# Altium PCB main_board.PcbDoc (part 3 of 3)
Units mil, origin at the board's own origin, x right, y up, seen from the top; angles counter-clockwise.
Board outline 11417.32 x 7421.26 mil, 2 copper layers (Top Layer, Bottom Layer); 177 components, 88 nets, 592 pads, 139 vias.
Unrouted connection lines stored in the file: 154.
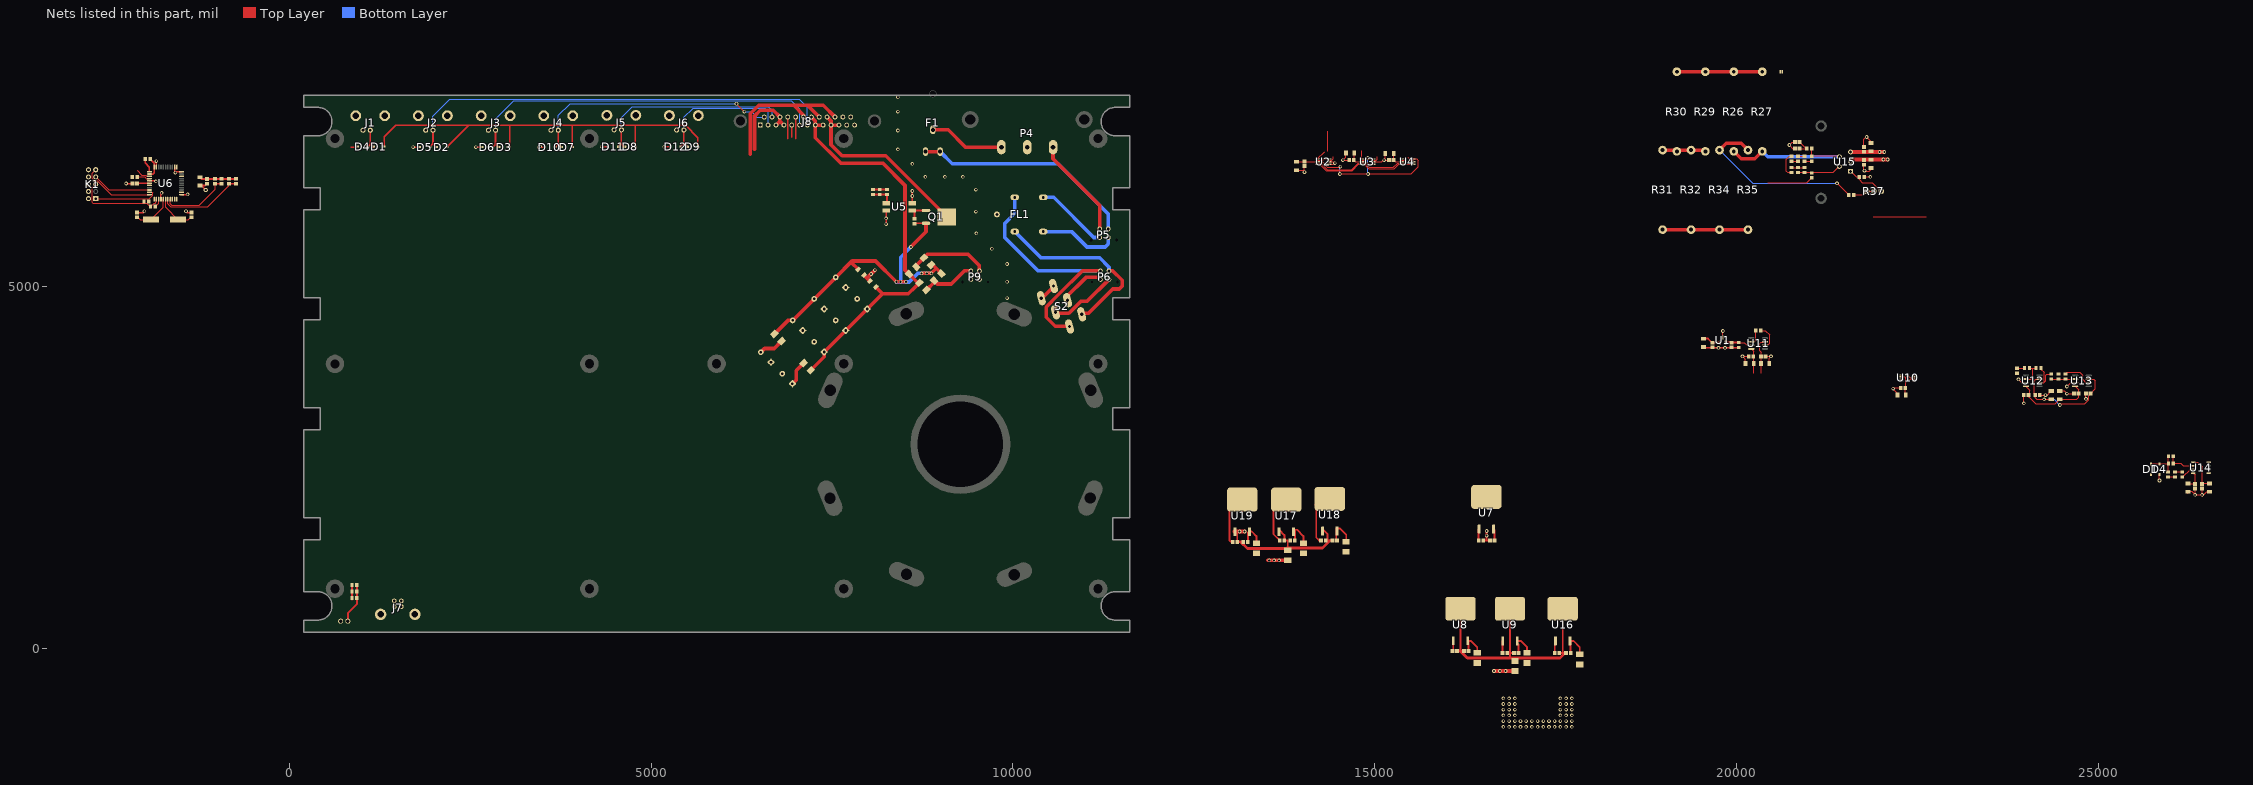
[diagram p2: the nets of this part, all layers, seen from the top]

## Part data (continued)
VR1 VR2: library part Varistor_MOV, "Varistor", Case=1206, Manufacturer=EPCOS, Manufacturer Part Number=B72520T0250K062, Max. operating voltage="25V AC", Power=8mW, Supplier Part Number 1=B72520T250K62, Varistor max current 8/20µs=200A, Category="SMD Varistors", ComponentLink1Description=http://static.tme.eu/products_pics/c/0/9/c09a96f753270fa18ba9e61c943ff8c8/58311.jpg, ComponentLink1URL=http://static.tme.eu/products_pics/c/0/9/c09a96f753270fa18ba9e61c943ff8c8/58311.jpg, Energy 2 ms=1J, MinAmount=5, Mounting=SMD, Multiples=1, Price Type=NET, Pricing 1="5=0.194, 50=0.158, 100=0.128, 500=0.119, 2000=0.114 (EUR)", Stock 1=1646, SuppliedAmount=0, Supplier 1=TME, Unit=pcs, Varistor type=metal-oxide, Weight=0.058
X1: library part CRYSTAL-GENERIC, "quartz crystal", Capacitance=20pF, Case=HC49SM, Frequency=16MHz, Manufacturer=YIC, Power=1mW, Resonator tolerance=±30ppm, Supplier Part Number 1=16.00M-SMDHC49S, Category="SMD Quartz Crystals", ComponentLink1Description=http://static.tme.eu/products_pics/0/4/3/0433aed25ec1f9097194a826a55aa53d/56913.jpg, ComponentLink1URL=http://static.tme.eu/products_pics/0/4/3/0433aed25ec1f9097194a826a55aa53d/56913.jpg, MinAmount=2, Mounting=SMD, Multiples=1, Price Type=NET, Pricing 1="2=0.3697, 10=0.2143, 100=0.1318, 1000=0.1033, 4000=0.0995 (EUR)", Resonator type=quartz, Stock 1=11958, SuppliedAmount=0, Supplier 1=TME, Time stability=±5ppm/year, Unit=pcs, Weight=1.11

## Free pads (board coordinates)
  round 255.91 hole 125.98: 2(631.89,826.77) 2(631.89,3935) 2(631.89,7047.24) 2(4147.64,826.77) 2(4147.64,3937.01) 2(4147.64,7047.24) 2(5905.51,3937.01) 2(7663.39,826.77) 2(7663.39,3937.01) 2(7663.39,7047.24) 2(11179.13,826.77) 2(11179.13,3937.01) 2(11179.13,7047.24)
  round 60 hole 30: 3(-1154.71,6337.85)

## Via types
v1: diameter 50, hole 28, Top Layer to Bottom Layer, 139 vias

## Nets (pads, with @x,y where several pads share a name; then routed paths per layer and width w, separated by ;. In a path a pad name is that pad's centre, name@x,y a point inside that pad or via, vN(x,y) a via of type N, cw(c..) or ccw(c..) an arc to the next point about the centre after c; other vN are vias at no path point)
2.5V: R17.1 R40.2 R41.2 U2.5 U2.7 U3.5 U3.7 U4.5 U4.7 U11.6 U14.6 | length 2978.6
  Top Layer w10: U2.7@14209.29,6749.68 14279.68,6749.68 ; U2.5@14370.71,6769.37 14299.37,6769.37 14279.68,6749.68 ; v1(14520,6560) v1(14910,6560) 15505,6560 15605,6660 15605,6745 15580.63,6769.37 U4.5@15530.71,6769.37 ; v1@14525,6655 14345,6655 14279.68,6720.32 14279.68,6749.68 ; U3.7@14819.29,6749.68 14854.68,6749.68 14874.37,6769.37 U3.5@14980.71,6769.37 ; R17.1@20334.61,4394.02 20398.58,4394.02 20457.64,4334.96 20457.64,4216.85 20432.64,4191.85 U11.6@20394.65,4191.85 ; R40.2@26038.39,2657.48 R41.2@26038.39,2559.06 26141.73,2559.06 26174.61,2526.18 U14.6@26312.2,2526.18
  Bottom Layer w10: v1(14520,6560) 14520,6655 v1(14525,6660) ; v1@14905,6565 v1(14905,6780)
5V: C1.1 C2.1 C4.1 C5.1 C6.1 C7.1 C8.1 C9.1 C10.1 C11.1 C22.1 C29.1 C30.1 D1.K D2.K D3.K D7.K D8.K D9.K J8.17 K1.2 R7.2 R8.2 R9.2 R10.2 R11.2 R14.2 U1.1 U2.8 U3.1 U3.8 U4.8 U6.2 U6.14 U6.24 U6.34 U6.44 U7.3 U10.1 U10.2 U10.3 U10.6 U10.7 | length 9035.2
  Top Layer w8: R14.2@-1850.26,6107.85 -1804.2,6153.91 U6.14@-1804.2,6210.41
  Top Layer w10: C5.1@13930,6730 U2.8@14189.29,6730 ; C7.1@14717.09,6850 14717.09,6744.41 14731.5,6730 U3.8@14819.29,6730 14880,6730 14919.37,6690.63 U3.1@14980.71,6690.63 ; C9.1@15262.09,6845 15262.09,6749.41 15281.5,6730 U4.8@15369.29,6730 ; U7.3@16644.21,1652.22 U7.3@16657.48,1638.96 ; U10.3@22283.46,3740.16 U10.2@22283.46,3759.84 ; U10.1@22283.46,3779.53 U10.2@22283.46,3759.84 ; C29.1@22334.65,3509.84 C30.1@22334.65,3602.36 22342.52,3610.24 22342.52,3681.1 ; U10.6@22454.46,3700.79 U10.7@22454.46,3720.47 22381.89,3720.47 22342.52,3681.1 ; U10.2@22283.46,3759.84 22322.83,3759.84 22342.52,3740.16 22342.52,3681.1
  Top Layer w20: U6.2@-1932.15,6558.83 -1885.69,6558.83 -1867.19,6577.34 U6.44@-1867.19,6655.29 -1867.19,6710.38 -1920.26,6763.45 R11.2@-1920.26,6767.85 ; D1.K@1311.1,6938.82 1311.1,7071.1 1470,7230 2478.74,7230 ; D2.K@2179.76,6931.02 2478.74,7230 ; D3.K@3045.9,6931.02 3045.9,7230 ; D7.K@3912.05,6931.02 3912.05,7227.95 3910,7230 ; D8.K@4784.09,6936.93 4784.09,7224.09 4790,7230 ; D9.K@5647.48,6934.17 5647.48,7062.52 5480,7230 4790,7230 ; C29.1@22334.65,3509.84 C29.1@22340.55,3503.94 ; 2478.74,7230 3045.9,7230 ; 3045.9,7230 3910,7230 ; 3910,7230 4790,7230
  Top Layer w25: C10.1@-1234.71,6514.94 -1209.12,6489.35 C11.1@-1134.71,6489.35 R10.2@-734.71,6489.35 ; 6889.67,7050.33 J8.17@6889.67,7346.54 ; C22.1@16657.48,1496.06 U7.3@16657.48,1638.96 ; C1.1@19531.93,4284.88 19606.34,4284.88 19661.93,4229.29 19761.46,4229.29
12V: C33.1 C34.1 C35.1 C36.1 C37.1 C38.1 C39.1 C40.1 C41.1 D20.K D21.K D22.K J8.18 U11.7 U12.7 U13.7 U14.8 U15.5 | length 3156
  Top Layer w10: 20339.53,3803.46 C38.1@20339.53,3941.26 C39.1@20339.53,4039.68 20339.53,4098.74 20319.84,4118.43 20319.84,4216.85 20339.53,4236.54 20389.33,4236.54 U11.7@20394.65,4241.85 ; U12.7@24188.98,3725.79 24139.17,3725.79 24114.17,3700.79 24114.17,3519.69 C34.1@24129.92,3503.94 24129.92,3468.5 24151.57,3446.85 C33.1@24350.39,3446.85 ; v1@24468.5,3385.83 24814.69,3385.83 24867.3,3438.43 24867.3,3497.22 C35.1@24893.7,3523.62 24960.63,3590.55 24960.63,3700.79 24936.42,3725 U13.7@24869.49,3725 ; C40.1@26240.16,2281.5 C41.1@26332.68,2281.5 ; U14.8@26312.2,2426.18 26338.58,2399.8 C41.1@26338.58,2275.59 ; C41.1@26332.68,2261.81 C41.1@26338.58,2255.91
  Top Layer w25: 6998.37,7051.63 J8.18@6998.37,7346.54
  Top Layer w50: U15.5@21577.25,6863.94 v1(21980,6863.94) v1(22043.94,6863.94)
  Bottom Layer w10: v1(24251.97,3444.88) 24389.76,3444.88 v1(24468.5,3366.14)
-12V: C42.2 C43.2 C44.2 C45.2 C46.2 C47.2 C48.2 C49.2 C50.2 D25.A D26.A D27.A J8.5 U11.4 U12.4 U13.4 U14.5 U15.3 | length 2675.4
  Top Layer w10: U11.4@20205.67,4141.85 20241.1,4106.42 20241.1,3943.23 C47.2@20239.13,3941.26 20239.13,3805.43 ; U12.4@24000,3625.79 24055.12,3570.67 24055.12,3464.57 ; C43.2@24035.43,3503.94 24035.43,3484.25 24055.12,3464.57 ; U13.4@24680.51,3625 24728.35,3577.17 C44.2@24728.35,3523.62 24728.35,3472.44 24702.76,3446.85 C42.2@24468.5,3446.85 24407.48,3385.83 24133.86,3385.83 24055.12,3464.57 ; U14.5@26312.2,2576.18 26375.39,2576.18 26437.01,2514.57 26437.01,2283.46 26440.94,2287.4 C49.2@26529.53,2287.4 ; C49.2@26529.53,2267.72 C49.2@26535.43,2261.81
  Top Layer w25: 6944.02,7065.98 J8.5@6944.02,7234.72
  Top Layer w50: U15.3@21577.25,6730.08 21607.17,6760 v1(22030,6760) v1(22090,6760)
-VUN: C24.2 C25.2 C26.2 D17.A D18.A D19.K Q1.S R5.1 VR2.2 | length 4520.7
  Top Layer w25: R5.1@8639.88,5870.55 8647.16,5877.83 Q1.S@8799.88,5877.83
  Top Layer w50: D19.K@6704.85,4348.8 6891.68,4535.63 C26.2@6956.43,4535.63 C25.2@7253.42,4832.61 C24.2@7550.4,5129.6 7777.79,5356.98 8103.02,5356.98 v1(8390,5070) v1(8450,5070) v1(8520,5070) ; 7777.79,5326.47 VR2.2@7862.48,5241.79 ; v1(8590,5550) 8799.88,5759.88 Q1.S@8799.88,5877.83 ; v1(8740,5187.19) v1(8810,5187.19) v1(8873.17,5187.19) 8940.74,5254.76 ; D17.A@8894.39,5307.4 8894.39,5301.11 8940.74,5254.76 ; D18.A@9011.45,5184.05 8940.74,5254.76
  Bottom Layer w50: v1@8390,5066.98 8450,5066.98 8569.12,5066.98 8689.33,5187.19 v1(8740,5187.19) v1(8810,5187.19) v1(8873.17,5187.19) ; v1(8450,5070) 8450,5410 v1(8590,5550)
AUX1: J8.12 | length 61.6
  Top Layer w10: 15369.29,6749.68 15409.68,6749.68 15424.68,6764.68
AUX2: J8.24
CONN1_PRES: U6.21
CONN2_PRES: U6.20
CSADC: U6.22
D_N: R6.1 U6.3 | length 201.5
  Top Layer w15: -2100.26,6607.85 -2035.26,6542.85 -1985.75,6542.85 -1970.24,6527.34 U6.3@-1932.15,6527.34
D_P: R12.1 U6.4 | length 177.2
  Top Layer w15: R12.1@-2100.26,6517.85 -1996.11,6517.85 -1974.1,6495.84 U6.4@-1932.15,6495.84
Gauss: D2.A D5.K J2.1 J8.7 U4.4 | length 6439.8
  Top Layer w10: 14355,6875 14355,7149.27 ; 15455.19,6789.81 15495.32,6749.68 U4.4@15530.71,6749.68
  Top Layer w25: D5.K@1943.54,6931.02 1943.54,6937.32 1985.67,6979.45 ; J2.1@1985.67,7164.09 1985.67,6979.45 ; D2.A@2034.09,6931.02 1985.67,6979.45
  Bottom Layer w10: J2.1@1985.67,7164.09 1985.67,7355.67 2220,7590 7050,7590 7161.42,7478.58 J8.7@7161.42,7234.72
GND: C1.2 C2.2 C3.2 C4.2 C5.2 C6.2 C7.2 C8.2 C9.2 C10.2 C11.2 C12.1 C13.2 C14.2 C15.2 C16.2 C17.2 C18.2 C21.2 C22.2 C24.1 C25.1 C26.1 C27.1 C29.2 C30.2 C31.2 C32.2 C33.2 C34.2 C35.2 C36.2 C37.2 C38.2 C39.2 C40.2 C41.2 C42.1 C43.1 C44.1 C45.1 C46.1 C47.1 C48.1 C49.1 C50.1 D4.A D5.A D6.A D10.A D11.A D12.A D13.2 D23.K D24.A FL1.3 J1.1@20634,7970 J1.2@1019.53,7164.09 J1.A J1.B J2.2 J2.A J2.B J3.2 J3.A J3.B J4.2 J4.A J4.B J5.2 J5.A J5.B J6.2 J6.A J6.B J7.4 J8.1 J8.13 J8.25 K1.4 K1.6 K1.8 K1.10 P4.2 P9.3 P9.4 pad.3 R1.2 R42.2 U1.3 U2.1 U2.3 U3.3 U4.3 U5.2 U5.4 U6.5 U6.15 U6.23 U6.33 U6.35 U6.43 U7.2 U10.8 U12.3 U13.3 VR1.2 VR2.1 | length 7332
  Top Layer w10: C5.2@13920,6612.91 14002.91,6612.91 v1(14030,6585.83) C4.2@14030,6668.5 ; U2.1@14370.71,6690.63 14430.63,6690.63 v1(14450,6710) 14430,6730 U2.3@14370.71,6730 ; C7.2@14602.91,6850 14602.91,6792.91 v1(14560,6750) C6.2@14648.5,6750 ; U3.3@14980.71,6730 15100,6730 v1@15120,6750 ; C9.2@15147.91,6845 15147.91,6777.91 v1@15120,6750 ; C8.2@15198.5,6750 v1(15130,6750) v1@15120,6750 ; v1(19811.42,4388.9) 19812.19,4388.13 U1.3@19812.19,4300.38 ; C47.1@20124.96,3941.26 20124.96,3998.35 v1(20083.62,4039.68) C48.1@20170.24,4039.68 ; C39.2@20402.52,4039.68 v1(20477.32,4039.68) 20453.7,4016.06 C38.2@20453.7,3941.26 ; C32.2@20808.5,6910 20780,6910 v1(20730,6960) 20770,7000 C31.2@20808.5,7000 ; C46.1@21757.56,6686.77 v1@21757.56,6617.56 ; C37.2@21757.56,6934.8 21757.56,7037.56 21790,7070 v1(21800,7070) 21855.98,7014.02 C36.2@21855.98,6991.89 ; R42.2@21764.45,6520 v1(21850,6520) ; v1(21770,6605.12) v1@21757.56,6617.56 ; C45.1@21867.48,6630 21837.48,6600 21757.56,6600 v1@21757.56,6617.56 ; C29.2@22226.38,3503.94 22226.38,3521.65 22165.35,3582.68 v1(22165.35,3592.52) 22165.35,3602.36 C30.2@22271.65,3602.36 ; v1(22362.2,3779.53) 22401.57,3740.16 U10.8@22454.46,3740.16 ; v1(23897.64,3720.47) 23942.32,3675.79 U12.3@24000,3675.79 ; v1(23972.44,3389.76) C43.1@23972.44,3503.94 ; C34.2@24192.91,3503.94 v1(24271.65,3503.94) 24293.31,3503.94 C33.2@24350.39,3561.02 ; C42.1@24468.5,3561.02 24529.53,3561.02 v1(24566.93,3523.62) C44.1@24665.35,3523.62 ; v1(24566.93,3622.05) 24619.88,3675 U13.3@24680.51,3675 ; v1(24830.71,3452.76) C35.2@24830.71,3523.62 ; v1(25846.46,2322.83) D4.A@25846.46,2407.48 ; C40.2@26240.16,2147.64 C40.2@26246.06,2153.54 ; C40.2@26246.06,2173.23 26291.34,2173.23 v1(26338.58,2125.98) ; C41.2@26338.58,2212.6 v1(26338.58,2125.98) ; v1@26437.01,2106.3 v1@26442.91,2112.2 ; C50.1@26437.01,2212.6 v1(26437.01,2125.98) v1(26338.58,2125.98) ; v1@26442.91,2131.89 26462.6,2131.89 26498.03,2167.32 C49.1@26535.43,2167.32
  Top Layer w20: v1(-2254.71,6427.85) C12.1@-2174.71,6427.85 ; C13.2@-2101.52,6026.08 -2020.02,6026.08 v1(-2001.52,6044.58) ; U6.5@-1932.15,6464.35 -1851.2,6464.35 v1(-1844.71,6457.85) ; U6.43@-1835.69,6655.29 v1(-1835.69,6736.86) ; U6.15@-1772.7,6210.41 -1772.7,6289.86 v1(-1764.71,6297.85) ; U6.35@-1583.72,6655.29 -1583.72,6586.86 v1(-1574.71,6577.85) -1562.23,6590.33 U6.33@-1487.27,6590.33 ; U6.23@-1487.27,6275.37 v1@-1407.19,6275.37 ; v1(-1426.52,6044.58) -1408.01,6026.08 C14.2@-1351.52,6026.08 ; 847.09,6931.02 D4.A@931.73,6931.02 ; v1(1713.23,6931.02) D5.A@1797.87,6931.02 ; v1(2579.37,6931.02) D6.A@2664.02,6931.02 ; v1(3445.51,6931.02) D10.A@3530.16,6931.02 ; v1(4317.56,6936.93) D11.A@4402.21,6936.93 ; v1(5180.94,6934.17) D12.A@5265.59,6934.17 ; v1@8249.76,5854.88 v1(8249.76,5945.12) U5.2@8249.76,6055 ; U5.4@8610,6155 v1(8610,6255) v1@8610,6325
  Top Layer w25: C10.2@-1234.71,6400.76 C10.2@-1217.62,6400.76 ; pad.3@-1154.71,6337.85 C10.2@-1217.62,6400.76 ; C11.2@-1134.71,6426.35 -1160.3,6400.76 C10.2@-1217.62,6400.76 ; C21.2@16500,1496.06 16547.24,1496.06 ; v1(16547.24,1625.98) v1(16547.24,1561.02) 16547.24,1496.06 ; C22.2@16594.49,1496.06 16547.24,1496.06 ; C1.2@19541.93,4157.8 v1(19751.93,4157.8) v1(19841.93,4157.8) R1.2@20024.57,4157.8
  Top Layer w50: VR2.1@7943.21,5161.06 7984.16,5120.1 ; VR1.2@8025.11,5079.15 7984.16,5120.1 ; v1(8093.76,5229.71) v1(8040.73,5176.67) 7984.16,5120.1 ; v1@13523.62,1220.47 v1(13543.31,1220.47) 13543.78,1220 v1(13610,1220) 13680.63,1220 v1(13681.1,1220.47) D24.A@13799.21,1220.47 ; v1@16650,-309.76 v1(16730,-309.76) D23.K@16940,-309.76
  other v1: 16779.57,-1080.39 16858.31,-1080.39 16937.05,-1080.39 17015.79,-1080.39 17094.53,-1080.39 17173.27,-1080.39 17252.01,-1080.39 17330.75,-1080.39 17409.49,-1080.39 17488.23,-1080.39 17566.97,-1080.39 17645.71,-1080.39 17724.45,-1080.39 16779.57,-1001.65 16858.31,-1001.65 16937.05,-1001.65 17015.79,-1001.65 17094.53,-1001.65 17173.27,-1001.65 17252.01,-1001.65 17330.75,-1001.65 17409.49,-1001.65 17488.23,-1001.65 17566.97,-1001.65 17645.71,-1001.65 17724.45,-1001.65 16779.57,-922.91 16858.31,-922.91 16937.05,-922.91 17566.97,-922.91 17645.71,-922.91 17724.45,-922.91 16779.57,-844.17 16858.31,-844.17 16937.05,-844.17 17566.97,-844.17 17645.71,-844.17 17724.45,-844.17 16779.57,-765.43 16858.31,-765.43 16937.05,-765.43 17566.97,-765.43 17645.71,-765.43 17724.45,-765.43 16779.57,-686.69 16858.31,-686.69 16937.05,-686.69 17566.97,-686.69 17645.71,-686.69 17724.45,-686.69 16650,-310 16810,-310 9921.26,4842.52 9921.26,5070 9921.26,5314.96 9710,5526.22 9496.22,5740 8249.88,5865 9488.19,6040 -1404.71,6277.85 8609.88,6325 9488.19,6341.81 8790,6520 9060,6520 9310,6520 8610,6700 8410,6900 3467.09,6941.02 8410,7160 8410,7420 8410,7620
Heater_N: J8.10 J8.11 J8.22 Q1.D | length 2538.9
  Top Layer w50: J8.22@7433.17,7346.54 7487.52,7292.18 J8.10@7487.52,7234.72 ; J8.11@7596.22,7234.72 J8.10@7487.52,7234.72 ; Q1.D@9086.3,5978.7 Q1.D@9086.3,5966.42 8242.72,6810 7640,6810 7487.52,6962.48 J8.10@7487.52,7234.72
Heater_P: C15.1 C16.1 C17.1 D14.A D15.K D16.K J8.8 J8.9 J8.20 VR1.1 | length 5541.7
  Top Layer w50: D14.A@7206.73,3846.92 7392.61,4032.8 C17.1@7392.61,4099.45 ; J8.20@7215.77,7346.54 7270.12,7292.19 J8.8@7270.12,7234.72 ; J8.9@7378.82,7234.72 J8.8@7270.12,7234.72 ; C17.1@7393.73,4098.33 8199.83,4904.44 ; VR1.1@8105.84,4998.42 8199.83,4904.44 ; J8.8@7270.12,7234.72 7270.12,7059.88 7620,6710 8200,6710 8510,6400 8510,5233.28 D15.K@8566.14,5177.14 8687.46,5055.82 D16.K@8707.56,5055.82 8639.83,4988.09 8556.18,4904.44 8199.83,4904.44
I2C-SCL: R9.1 R10.1 U2.10 U3.10 U4.10 U6.18 U10.4 | length 2437.4
  Top Layer w8: U6.18@-1678.21,6210.41 -1678.21,6151.35 -1634.71,6107.85 -1124.71,6107.85 -834.71,6397.85 R9.1@-834.71,6413.4 ; U2.10@14209.29,6690.63 14244.37,6690.63 14330,6605 14689.8,6605 14775.43,6690.63 U3.10@14819.29,6690.63 14859.37,6690.63 14920,6630 15270,6630 15330.63,6690.63 U4.10@15369.29,6690.63
  Top Layer w20: R9.1@-834.71,6423.4 R10.1@-734.71,6423.4
I2C-SDA: R7.1 R8.1 U2.9 U3.9 U4.1 U4.9 U6.19 U10.5 | length 2407.2
  Top Layer w8: U6.19@-1646.72,6210.41 -1646.72,6149.86 -1624.71,6127.85 -1244.71,6127.85 -1024.71,6347.85 R7.1@-1024.71,6427.85 ; U2.9@14209.29,6710.31 14254.69,6710.31 14345,6620 14685,6620 14775.31,6710.31 U3.9@14819.29,6710.31 14864.69,6710.31 14925,6650 15260,6650 15320.31,6710.31 U4.9@15369.29,6710.31 15414.69,6710.31 15434.37,6690.63 U4.1@15530.71,6690.63
  Top Layer w20: R7.1@-1024.71,6423.4 R8.1@-934.71,6423.4
I_meas: D1.A D4.K J1.1@1119.53,7164.09 R39.1 R40.1 R41.1 U4.6 | length 756.8
  Top Layer w10: D1.A@25728.35,2553.15 D4.K@25846.46,2553.15 25963.58,2553.15 R41.1@25969.49,2559.06 R40.1@25969.49,2652.56 ; R39.1@25964.57,2440.94 R41.1@25964.57,2544.29
  Top Layer w25: D4.K@1077.4,6931.02 1119.53,6973.15 ; J1.1@1119.53,7164.09 1119.53,6973.15 ; D1.A@1167.95,6931.02 1161.65,6931.02 1119.53,6973.15
LED1: R13.2 R15.2 R16.2 U6.12 | length 200
  Top Layer w25: R13.2@865.55,680 R13.2@865.55,700 R15.2@865.55,790 R16.2@865.55,880
NetC3_1: C3.1 R1.1 U1.2 U11.3 | length 371.7
  Top Layer w10: R1.1@20032.07,4229.51 R1.1@20032.19,4229.39 20110.45,4229.39 20147.99,4191.85 U11.3@20205.67,4191.85
  Top Layer w25: U1.2@19849.59,4229.51 R1.1@20032.07,4229.51
NetC12_2: C12.2 U6.6 | length 164.6
  Top Layer w8: C12.2@-2094.71,6427.85 C12.2@-2089.71,6432.85
  Top Layer w20: C12.2@-2089.71,6432.85 U6.6@-1932.15,6432.85
NetC18_1: C18.1 C19.1 C21.1 C51.1 C53.1 D14.K U7.1 U8.1 U9.1 U16.1 | length 975.5
  Top Layer w25: C19.1@16074.41,-30.71 16085.91,-19.21 U8.1@16085.91,106.79 ; C21.1@16437.01,1496.06 16437.01,1645.02 U7.1@16444.21,1652.22 ; C51.1@16767.72,-59.06 16767.72,103.82 U9.1@16770.08,106.18 ; C53.1@17488.19,-59.06 17488.19,95.94 U16.1@17498.43,106.18
  Top Layer w50: C18.1@6961.28,3668.11 7004.82,3711.65 7004.82,3842.66 D14.K@7107.9,3945.75
NetC19_2: C19.2 C20.2 C51.2 C52.2 C53.2 C54.2 D23.A U8.2 U9.2 U16.2 | length 3729.5
  Top Layer w25: U8.2@16185.91,551.79 16185.91,-25.91 16181.1,-30.71 C20.2@16234.41,-30.71 ; C51.2@16830.71,-59.06 16870.08,-59.06 ; 16870,-130 16870.08,-129.92 16870.08,-59.06 ; U9.2@16870.08,551.18 16870.08,-59.06 ; C52.2@16925.2,-59.06 16870.08,-59.06 ; U16.2@17598.43,551.18 17598.43,-59.06 ; 17614.69,-75.32 17598.43,-59.06 ; C54.2@17645.67,-59.06 17598.43,-59.06 ; 17598.43,-59.06 C53.2@17551.18,-59.06 17598.43,-59.06
  Top Layer w40: C19.2@16137.4,-30.71 16181.1,-30.71 16280.39,-130 16870,-130 17560,-130 17614.69,-75.32
NetC20_1: C20.1 D21.A U8.3 | length 388.5
  Top Layer w25: C20.1@16297.4,-30.71 16297.4,95.3 U8.3@16285.91,106.79 16330.22,106.79 16417.32,19.69 D21.A@16417.32,-59.06
NetC23_1: C23.1 C28.1 C55.1 C56.1 C57.1 C58.1 D24.K U17.1 U18.1 U19.1 | length 2223
  Top Layer w25: U19.1@13062.2,1618.6 13102.36,1578.44 C28.1@13102.36,1476.38 ; U17.1@13679.53,1641.61 13751.97,1569.17 C57.1@13751.97,1496.06 13799.21,1496.06 13799.21,1397.64 D24.K@13791.57,1390 ; U18.1@14270.08,1661.3 14350.39,1580.98 14350.39,1496.06 14383.86,1496.06
  Top Layer w40: C28.1@13102.36,1476.38 13149.61,1476.38 13241.19,1384.8 D24.K@13786.37,1384.8 ; D24.K@13791.57,1390 14277.8,1390 14383.86,1496.06
  Top Layer w50: U19.1@13062.2,1618.6 v1(13133.22,1618.6) v1(13204.23,1618.6)
NetC23_2: C23.2 D27.K U19.3 | length 376.8
  Top Layer w25: C23.2@13248.03,1476.38 13248.03,1604.43 13262.2,1618.6 13302.66,1618.6 13366.14,1555.12 D27.K@13366.14,1456.69
NetC27_2: C27.2 C28.2 C57.2 C58.2 D19.A U17.2 U18.2 U19.2 | length 2504.2
  Top Layer w25: C28.2@13039.37,1476.38 13011.81,1476.38 12992.13,1496.06 12992.13,1893.52 U19.2@13162.2,2063.6 ; C57.2@13688.98,1496.06 13602.36,1582.68 13602.36,1909.45 U17.2@13779.53,2086.61 ; U18.2@14192.91,1988.19 14192.91,1535.43 14232.28,1496.06 C58.2@14259.84,1496.06
  Top Layer w50: C27.2@6518.03,4097.22 6568.64,4147.83 6701.54,4147.83 D19.A@6803.68,4249.97 ; U18.2@14192.91,1988.19 14311.02,2106.3 U18.2@14370.08,2106.3
NetC31_1: C31.1 C32.1 R28.1 | length 225.8
  Top Layer w10: C32.1@20871.5,6910 R28.1@20961.5,6910 ; C31.1@20871.5,7000 R28.1@20961.5,6910 ; R28.1@20970,6910 R28.1@20961.5,6910
NetC52_1: C52.1 D22.A U9.3 | length 423.5
  Top Layer w25: C52.1@16988.19,-59.06 16988.19,59.06 16970.08,77.17 U9.3@16970.08,106.18 17019.8,106.18 17106.3,19.68 D22.A@17106.3,-59.06
NetC54_1: C54.1 D20.A U16.3 | length 439.9
  Top Layer w25: C54.1@17708.66,-59.06 17708.66,95.94 U16.3@17698.43,106.18 17748.15,106.18 17834.65,19.68 D20.A@17834.65,-78.74
NetC55_2: C55.2 D25.K U17.3 | length 401.9
  Top Layer w25: C55.2@13897.64,1496.06 13897.64,1623.5 13879.53,1641.61 13929.25,1641.61 14015.75,1555.12 D25.K@14015.75,1478.35
NetC56_2: C56.2 D26.K U18.3 | length 438
  Top Layer w25: C56.2@14480.31,1496.06 14470.08,1506.3 14470.08,1661.3 14519.8,1661.3 14606.3,1574.8 D26.K@14606.3,1478.35
NetD13_1: D13.1 R13.1 R15.1 R16.1 | length 551.6
  Top Layer w25: D13.1@810,380 810,490 934.45,614.45 R13.1@934.45,700 R15.1@934.45,790 R16.1@934.45,880
NetD15_A: D15.A D17.K P9.2 | length 1074.2
  Top Layer w50: D15.A@8664.97,5296.07 D17.K@8771.2,5402.3 8818.9,5450 9380,5450 9538,5292 P9.2@9538,5220
NetD16_A: D16.A D18.K P9.1 | length 774
  Top Layer w50: D16.A@8806.39,4956.99 8912.62,5063.23 D18.K@8912.62,5085.22 8959.14,5038.7 9148.7,5038.7 9330,5220 P9.1@9420,5220
NetF1_1: F1.1 P4.1 | length 1048.4
  Top Layer w50: F1.1@8893.5,7169.09 9105.91,7169.09 9345.87,6929.13 P4.1@9842.52,6929.13
NetF1_2: F1.2 P5.2 | length 3088.9
  Top Layer w50: F1.2@8793.11,6868.9 F1.2@8993.9,6868.9
  Bottom Layer w50: F1.2@8993.9,6868.9 9162.8,6700 10625,6700 11318,6007 P5.2@11318,5800
NetFL1_1: FL1.1 P5.3 | length 1010.1
  Bottom Layer w50: FL1.1@10420,6236.5 10563.68,6236.5 11118.68,5681.5 11199.5,5681.5 P5.3@11200,5682
NetFL1_2: FL1.2 P6.1 S2.2 | length 3604.9
  Top Layer w50: S2.2@10792.42,4455.54 10583.83,4455.54 10460,4579.37 10460,4720 10636.06,4896.06 10636.06,4896.2 10959.85,5220 P6.1@11210,5220
  Bottom Layer w50: FL1.2@10026,6236.5 10026,6016 9890,5880 9890,5680 10350,5220 P6.1@11210,5220
NetFL1_4: FL1.4 P6.2 S2.1 | length 2593.1
  Top Layer w50: S2.1@10944.76,4637.1 11047.1,4637.1 11380,4970 11470,4970 11510,5010 11510,5090 11380,5220 P6.2@11328,5220
  Bottom Layer w50: FL1.4@10026,5763.5 10389.5,5400 11200,5400 11328,5272 P6.2@11328,5220
NetFL1_5: FL1.5 P5.4 | length 1094.2
  Bottom Layer w50: FL1.5@10419,5763.5 10811.5,5763.5 11025,5550 11275,5550 11318,5593 P5.4@11318,5682
NetJ7_1: J7.1 U6.7
NetP4_3: P4.3 P5.1 | length 1396.3
  Top Layer w50: P4.3@10555.12,6929.13 10555.12,6769.88 11200,6125 P5.1@11200,5800
NetP6_3: P6.3 S2.3 | length 641.5
  Top Layer w50: S2.3@10734.02,4814.44 10734.02,4854.02 11010,5130 11182,5130 P6.3@11210,5102
NetP6_4: P6.4 S2.4 | length 941.2
  Top Layer w50: S2.4@10581.13,4632.84 10774.57,4632.84 10941.73,4800 11026,4800 P6.4@11328,5102
NetQ1_G: Q1.G R5.2 U5.3 | length 295.4
  Top Layer w25: U5.3@8610,6055 Q1.G@8799.88,6055 ; R5.2@8639.88,5939.45 U5.3@8639.88,6045
NetR2_1: R2.1 R3.1 R4.1 U5.1 | length 304.4
  Top Layer w25: R2.1@8066.48,6276.1 R4.1@8259.62,6276.1 ; U5.1@8259.88,6165.12 R4.1@8259.88,6276.36
NetR17_2: R17.2 U11.2 | length 200.9
  Top Layer w10: U11.2@20205.67,4241.85 20246.42,4241.85 20265.71,4261.14 R17.2@20265.71,4394.02
NetR18_1: R18.1 R24.2 U12.6 | length 471.8
  Top Layer w10: U12.6@24188.98,3675.79 24246.65,3675.79 24251.97,3681.1 ; R18.1@24207.68,3877.95 24207.68,3863.19 24251.97,3818.9 24251.97,3681.1 ; R24.2@24350.39,3794.29 24286.42,3794.29 24271.65,3779.53 24271.65,3700.79 24251.97,3681.1
NetR18_2: R18.2 R23.1 U12.2 | length 320.6
  Top Layer w10: U12.2@24000,3725.79 24069.49,3725.79 24094.49,3750.79 24094.49,3877.95 ; R23.1@24050.2,3877.95 24094.49,3877.95 ; R18.2@24138.78,3877.95 24094.49,3877.95
NetR19_1: R19.1 R26.2 R27.2 R28.2 U14.4 U15.4 | length 2071.2
  Top Layer w10: R28.2@21038.9,6910 21040,6908.9 R19.1@21040,6810 ; R19.1@21040,6804.45 R19.1@21040,6810 ; U15.4@21422.91,6797.01 21409.92,6810 R19.1@21040,6810
  Top Layer w50: R26.2@19963.15,6872.68 20066.69,6769.13 20253.31,6769.13 R27.2@20356.85,6872.68
  Bottom Layer w50: R27.2@20356.85,6872.68 20432.52,6797.01 U15.4@21422.91,6797.01
NetR19_2: R19.2 R48.1 | length 100
  Top Layer w10: R48.1@20940,6735.55 R19.2@21040,6735.55
NetR20_1: R20.1 R25.1 U13.6 | length 1063.8
  Top Layer w10: 20430,6440 20974.45,6440 R25.1@21040,6505.55 ; R20.1@24547.24,3794.29 24571.85,3818.9 24744.09,3818.9 24783.46,3779.53 24783.46,3720.47 24828.94,3675 U13.6@24869.49,3675
NetR20_2: R20.2 R21.1 R24.1 U13.2 | length 330.3
  Top Layer w10: R24.1@24350.39,3725.39 R21.1@24448.82,3725.39 R20.2@24547.24,3725.39 24547.64,3725 U13.2@24680.51,3725
NetR21_2: R21.2 U10.9
NetR22_1: R22.1 R23.2 | length 105.4
  Top Layer w10: R22.1@23877.95,3873.03 23882.87,3877.95 R23.2@23981.3,3877.95
NetR22_2: R22.2 U10.10
NetR25_2: R25.2 R43.2 R44.2 U15.2 | length 607.4
  Top Layer w10: R44.2@20850,6580 R43.2@20940,6580 21339.77,6580 U15.2@21422.91,6663.15
NetR26_1: R26.1 R27.1 R29.2 R30.2 | length 1181.1
  Top Layer w50: R30.2@19175.75,7972.68 R29.2@19569.45,7972.68 R26.1@19963.15,7972.68 R27.1@20356.85,7972.68
NetR29_1: R29.1 R30.1 R31.2 R32.2 | length 597.7
  Top Layer w10: R29.1@19552.13,6890 R29.1@19569.45,6872.68
  Top Layer w50: R31.2@18978.9,6890 R32.2@19372.6,6890 R29.1@19552.13,6890
NetR31_1: R31.1 R32.1 R34.2 R35.2 | length 1181.1
  Top Layer w50: R31.1@18978.9,5790 R32.1@19372.6,5790 R34.2@19766.3,5790 R35.2@20160,5790
NetR33_1: R33.1 R36.2 | length 98.4
  Top Layer w10: R36.2@26062.99,2440.94 R33.1@26161.42,2440.94
NetR33_2: R33.2 U14.7 | length 193.9
  Top Layer w10: R33.2@26161.42,2372.05 26171.26,2372.05 26275.39,2476.18 U14.7@26312.2,2476.18
NetR36_1: R36.1 R39.2 | length 98.4
  Top Layer w10: R39.2@25964.57,2372.05 R36.1@26062.99,2372.05
NetR37_1: R37.1 R42.1 U15.1 | length 558
  Top Layer w10: U15.1@21577.25,6596.22 21653.47,6520 R42.1@21695.55,6520 21695.55,6484.45 21740,6440 21880,6440 R37.1@22000,6320
NetR37_2: R37.2 R37.3 R38.2 | length 1030.7
  Top Layer w10: R38.2@21620,6270 21750,6270 R37.2@21800,6320 R37.3@21900,6320 ; 21890,5970 22620,5970
NetR43_1: R43.1 R44.1 R45.1 | length 180
  Top Layer w10: R45.1@20760,6648.9 R44.1@20850,6648.9 R43.1@20940,6648.9
NetR45_2: R45.2 R46.2 | length 329.3
  Top Layer w10: R45.2@20760,6580 20710,6580 20690,6600 20690,6764.45 20730,6804.45 R46.2@20760,6804.45
NetR46_1: R46.1 R47.1 | length 90
  Top Layer w10: R46.1@20760,6735.55 R47.1@20850,6735.55
NetR47_2: R47.2 R48.2 | length 90
  Top Layer w10: R47.2@20850,6804.45 R48.2@20940,6804.45
NetS2_5: S2.5 S2.6 | length 215.8
  Top Layer w50: S2.6@10409.37,4849.37 S2.5@10561.96,5001.96
PWMOUT: R2.2 R3.2 R4.2 U6.31 | length 193.1
  Top Layer w25: R2.2@8066.48,6345 R4.2@8259.62,6345
RDY: R11.1 U2.2 U3.2 U4.2 U6.1 | length 201.1
  Top Layer w20: R11.1@-1989.16,6767.85 -1989.16,6712.3 -1932.15,6655.29 U6.1@-1932.15,6590.33
RESET: K1.5 R14.1 U6.13 | length 1246.7
  Top Layer w8: K1.5@-2674.71,6417.85 -2724.71,6367.85 -2724.71,6167.85 -2714.71,6157.85 -1969.16,6157.85 R14.1@-1919.16,6107.85 -1869.16,6157.85 -1854.71,6157.85 -1835.69,6176.86 U6.13@-1835.69,6210.41
SAMPLE-I_N: J1.2@20606,7970 J8.19 J8.21 J8.23 | length 2294.3
  Top Layer w50: 6370,6830 6370,7390 6490,7510 6970,7510 ; J8.19@7107.07,7346.54 7107.07,7372.93 6970,7510 ; 7165.5,7505.5 J8.21@7324.47,7346.54 ; J8.23@7541.87,7346.54 7378.41,7510 6970,7510
SAMPLE-I_P: J8.3 J8.4 J8.16 R34.1 R35.1 R38.1 U14.1 | length 3607.8
  Top Layer w10: v1(21390,6431.1) R38.1@21551.1,6270
  Top Layer w50: 6430,6900 6430,7360 6510,7440 6687.5,7440 J8.16@6780.96,7346.54 6780.96,7289.07 ; J8.3@6726.61,7234.72 6780.96,7289.07 ; J8.4@6835.32,7234.72 6780.96,7289.07 ; R34.1@19766.3,6890 19860.98,6984.69 20065.32,6984.69 R35.1@20160,6890
  Bottom Layer w10: R34.1@19766.3,6890 20225.2,6431.1 v1(21390,6431.1)
SPI-MISO: K1.9 U6.11 | length 1025.4
  Top Layer w8: K1.9@-2674.71,6617.85 -2724.71,6567.85 -2724.71,6497.85 -2694.71,6467.85 -2654.71,6467.85 -2462.23,6275.37 U6.11@-1932.15,6275.37
SPI-MOSI: K1.1 U6.10 | length 891.9
  Top Layer w8: K1.1@-2674.71,6217.85 -1934.71,6217.85 -1884.71,6267.85 -1884.71,6297.85 -1893.72,6306.87 U6.10@-1932.15,6306.87
SPI-SCK: K1.7 U6.9 | length 816.9
  Top Layer w8: K1.7@-2674.71,6517.85 -2495.22,6338.36 U6.9@-1932.15,6338.36
Temp: D3.A D6.K J3.1 J8.6 U3.4 | length 5137.7
  Top Layer w10: U3.4@14980.71,6749.68 15019.68,6749.68 15035,6765 15035,6795
  Top Layer w25: D6.K@2809.68,6931.02 2851.81,6973.15 ; J3.1@2851.81,7164.09 2851.81,6973.15 ; D3.A@2900.24,6931.02 2893.94,6931.02 2851.81,6973.15
  Bottom Layer w10: J3.1@2851.81,7164.09 2851.81,7321.81 3100,7570 6940,7570 7052.72,7457.28 J8.6@7052.72,7234.72
USBD_N: J7.2 R6.2
USBD_P: J7.3 R12.2
VH1: D9.A D12.K J6.1 J8.2 U2.4 | length 2017
  Top Layer w10: U2.4@14370.71,6749.68 14371.02,6750 14410,6750 14430,6770 14430,6800
  Top Layer w20: D12.K@5411.26,6934.17 5453.39,6976.3 5453.39,6982.6 ; J6.1@5453.39,7167.24 5453.39,6982.6 ; D9.A@5501.81,6934.17 5453.39,6982.6
  Bottom Layer w10: J6.1@5453.39,7167.24 5453.39,7343.39 5580,7470 6570,7470 6617.91,7422.09 J8.2@6617.91,7234.72
VH2: D8.A D11.K J5.1 J8.15 U2.6 | length 2880.8
  Top Layer w10: U2.6@14209.29,6769.37 14307.91,6867.99
  Top Layer w20: D11.K@4547.87,6936.93 4587.24,6976.3 ; J5.1@4587.24,7167.24 4587.24,6976.3 ; D8.A@4638.43,6936.93 4626.61,6936.93 4587.24,6976.3
  Bottom Layer w10: J5.1@4590,7170 4590,7340 4740,7490 6620,7490 6672.26,7437.74 J8.15@6672.26,7346.54
Vr: D7.A D10.K J4.1 J8.14 U3.6 | length 3590.7
  Top Layer w10: v1(6180,7530) 6270,7440 ; U3.6@14819.29,6770.71 14819.29,6880.71
  Top Layer w20: D10.K@3675.83,6931.02 3717.95,6973.15 ; J4.1@3717.95,7164.09 3717.95,6973.15 ; D7.A@3766.38,6931.02 3724.25,6973.15 3717.95,6973.15
  Bottom Layer w10: J4.1@3717.95,7164.09 3717.95,7367.95 3880,7530 v1(6180,7530) ; v1(6290,7420) 6390.1,7420 6463.56,7346.54 J8.14@6563.56,7346.54
XTAL_N: C14.1 U6.17 X1.2 | length 557.3
  Top Layer w15: U6.17@-1709.71,6210.41 -1709.71,6099.86 X1.2@-1537.7,5927.85 -1393.25,5927.85 C14.1@-1351.52,5969.58
XTAL_P: C13.1 U6.16 X1.1 | length 560.3
  Top Layer w15: C13.1@-2101.52,5969.58 -2059.79,5927.85 X1.1@-1911.72,5927.85 -1741.21,6098.36 U6.16@-1741.21,6210.41
pads on no net: *.1 D1.0 D2.0 D3.0 D4.0 D5.0 D6.0 D7.0 D8.0 D9.0 D10.0 D11.0 D12.0 F1.4 J8.26 J8.27 K1.3 P4.NC P5.NC P6.NC P9.NC R26.0 R27.0 R29.0 R30.0 R31.0 R32.0 R34.0 R35.0 T1.NC U6.8 U6.25 U6.26 U6.27 U6.28 U6.29 U6.30 U6.32 U6.36 U6.37 U6.38 U6.39 U6.40 U6.41 U6.42 U7.0 U8.0 U9.0 U11.1 U11.5 U11.8 U12.1 U12.5 U12.8 U13.1 U13.5 U13.8 U14.0 U14.2 U14.3 U15.0 U16.0 U17.0 U18.0 U19.0

## Other copper
Multi-Layer:
  rectangle net NetC27_2: 12420,1780 14830,2820
  region net GND: 17775,-635.51 16740.2,-635.51 16740.2,-1135.51 17775,-1135.51
  region net Heater_N: 8959.88,6285 8959.88,5645 9329.88,5645 9329.88,6285
  lines w50 net GND: 8410,7620 8410,6900 8790,6520 9310,6520 9488.19,6341.81 9488.19,5748.03 9921.26,5314.96 9921.26,4842.52

## Silkscreen, mask and mechanical layers (free items; w line width, h text height)
Top Overlay:
  lines w10: 8429.88,5765 8429.88,6385 ; 8459.88,5765 8459.88,6385
  text "To Switch" at 10890,5950 h80
  text "LV OUT" at 9251.97,5393.7 h80
  text "HV IN" at 11060,5390 h80
Top Solder:
  region: 17763.82,-1135.51 17763.82,-635.51 17425,-635.51 17425,-925.51 17105,-925.51 17105,-635.51 16740.2,-635.51 16740.2,-1135.51
  region: 9329.88,6285 8959.88,6285 8959.88,6125 9249.88,6125 9249.88,5805 8959.88,5805 8959.88,5645 9329.88,5645
Bottom Solder:
  region: 17763.82,-635.51 16765,-635.51 16765,-1135.51 17763.82,-1135.51
  region: 8959.88,6285 8959.88,5645 9329.88,5645 9329.88,6285
Mechanical 1:
  drawing of 220 lines, arcs and shapes, not listed
Mechanical 2:
  circle w0.5: c11417.32,590.55 r64.96
  circle w0.5: c11417.32,7283.46 r64.96
  circle w0.5: c393.7,7283.46 r64.96
  circle w0.5: c393.7,590.55 r64.96

## Text inside footprints (layer, text, board x,y; h text height)
J8: Top Overlay "1" at 6499.37,7094.76 h59.06; Top Overlay "14" at 6519.27,7468.78 h59.06; Top Overlay "25" at 7710.06,7468.78 h59.06; Top Overlay "13" at 7769.33,7094.76 h59.06
R37: Top Overlay "CW" at 22027.56,6258.31 h25 r180
U10: Top Overlay "*" at 22278.96,3810.16 h50
U15: Top Overlay "1" at 21684.53,6587.56 h40 r90; Top Overlay "5" at 21684.53,6847.4 h40 r90